# Altium PCB PCB1.pcbdoc
Units mil, origin at the board's own origin, x right, y up, seen from the top; angles counter-clockwise.
Board outline 5600 x 5600 mil, 2 copper layers (Top Layer, Bottom Layer); 67 components, 31 nets, 147 pads, 27 vias.
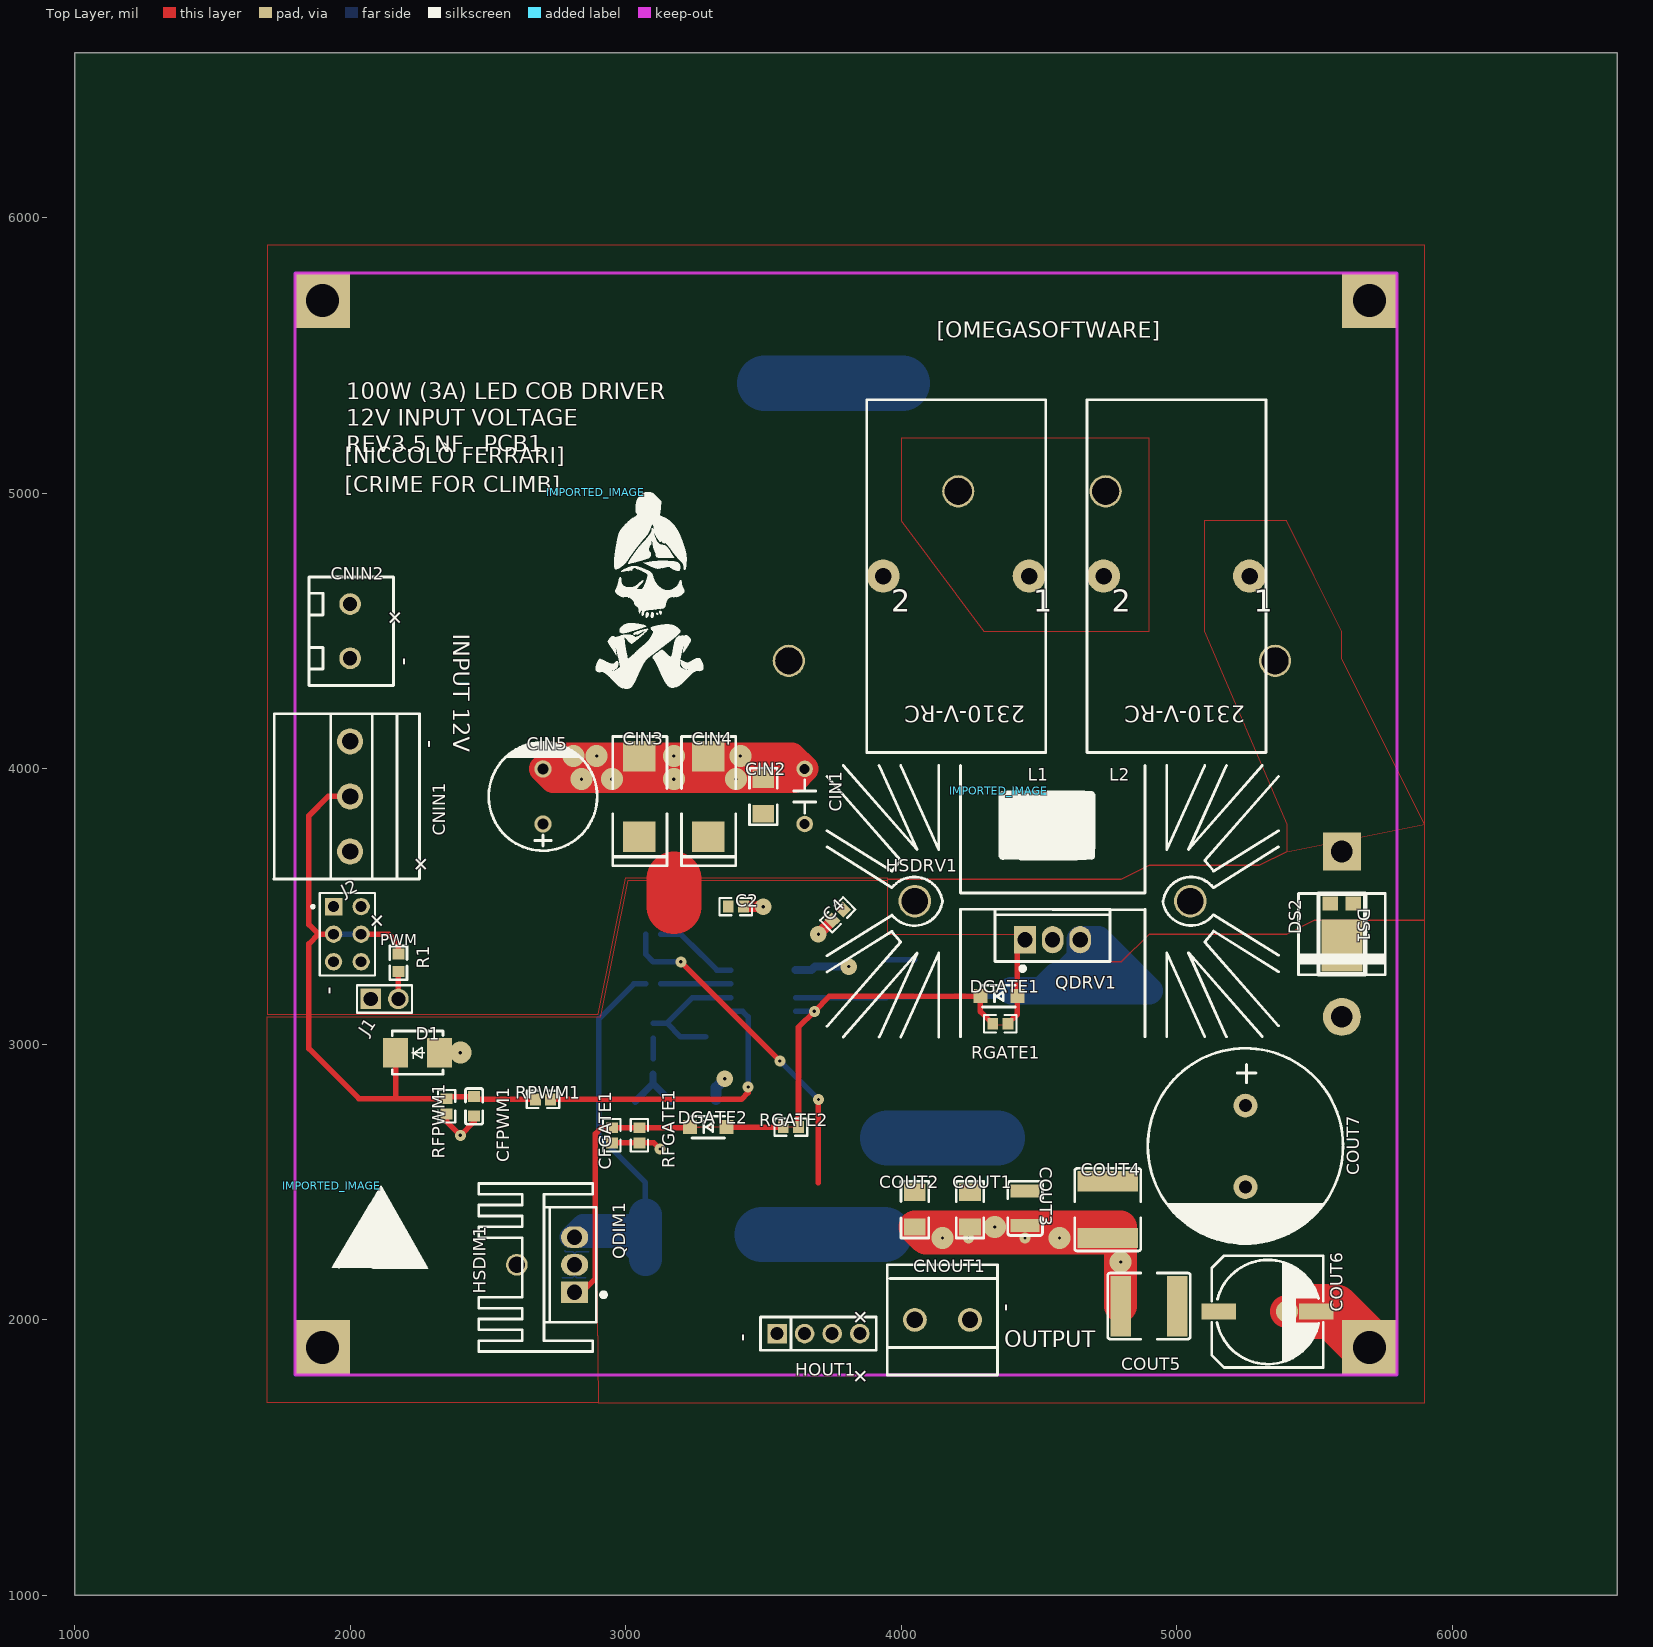
[diagram p0: Top Layer view]
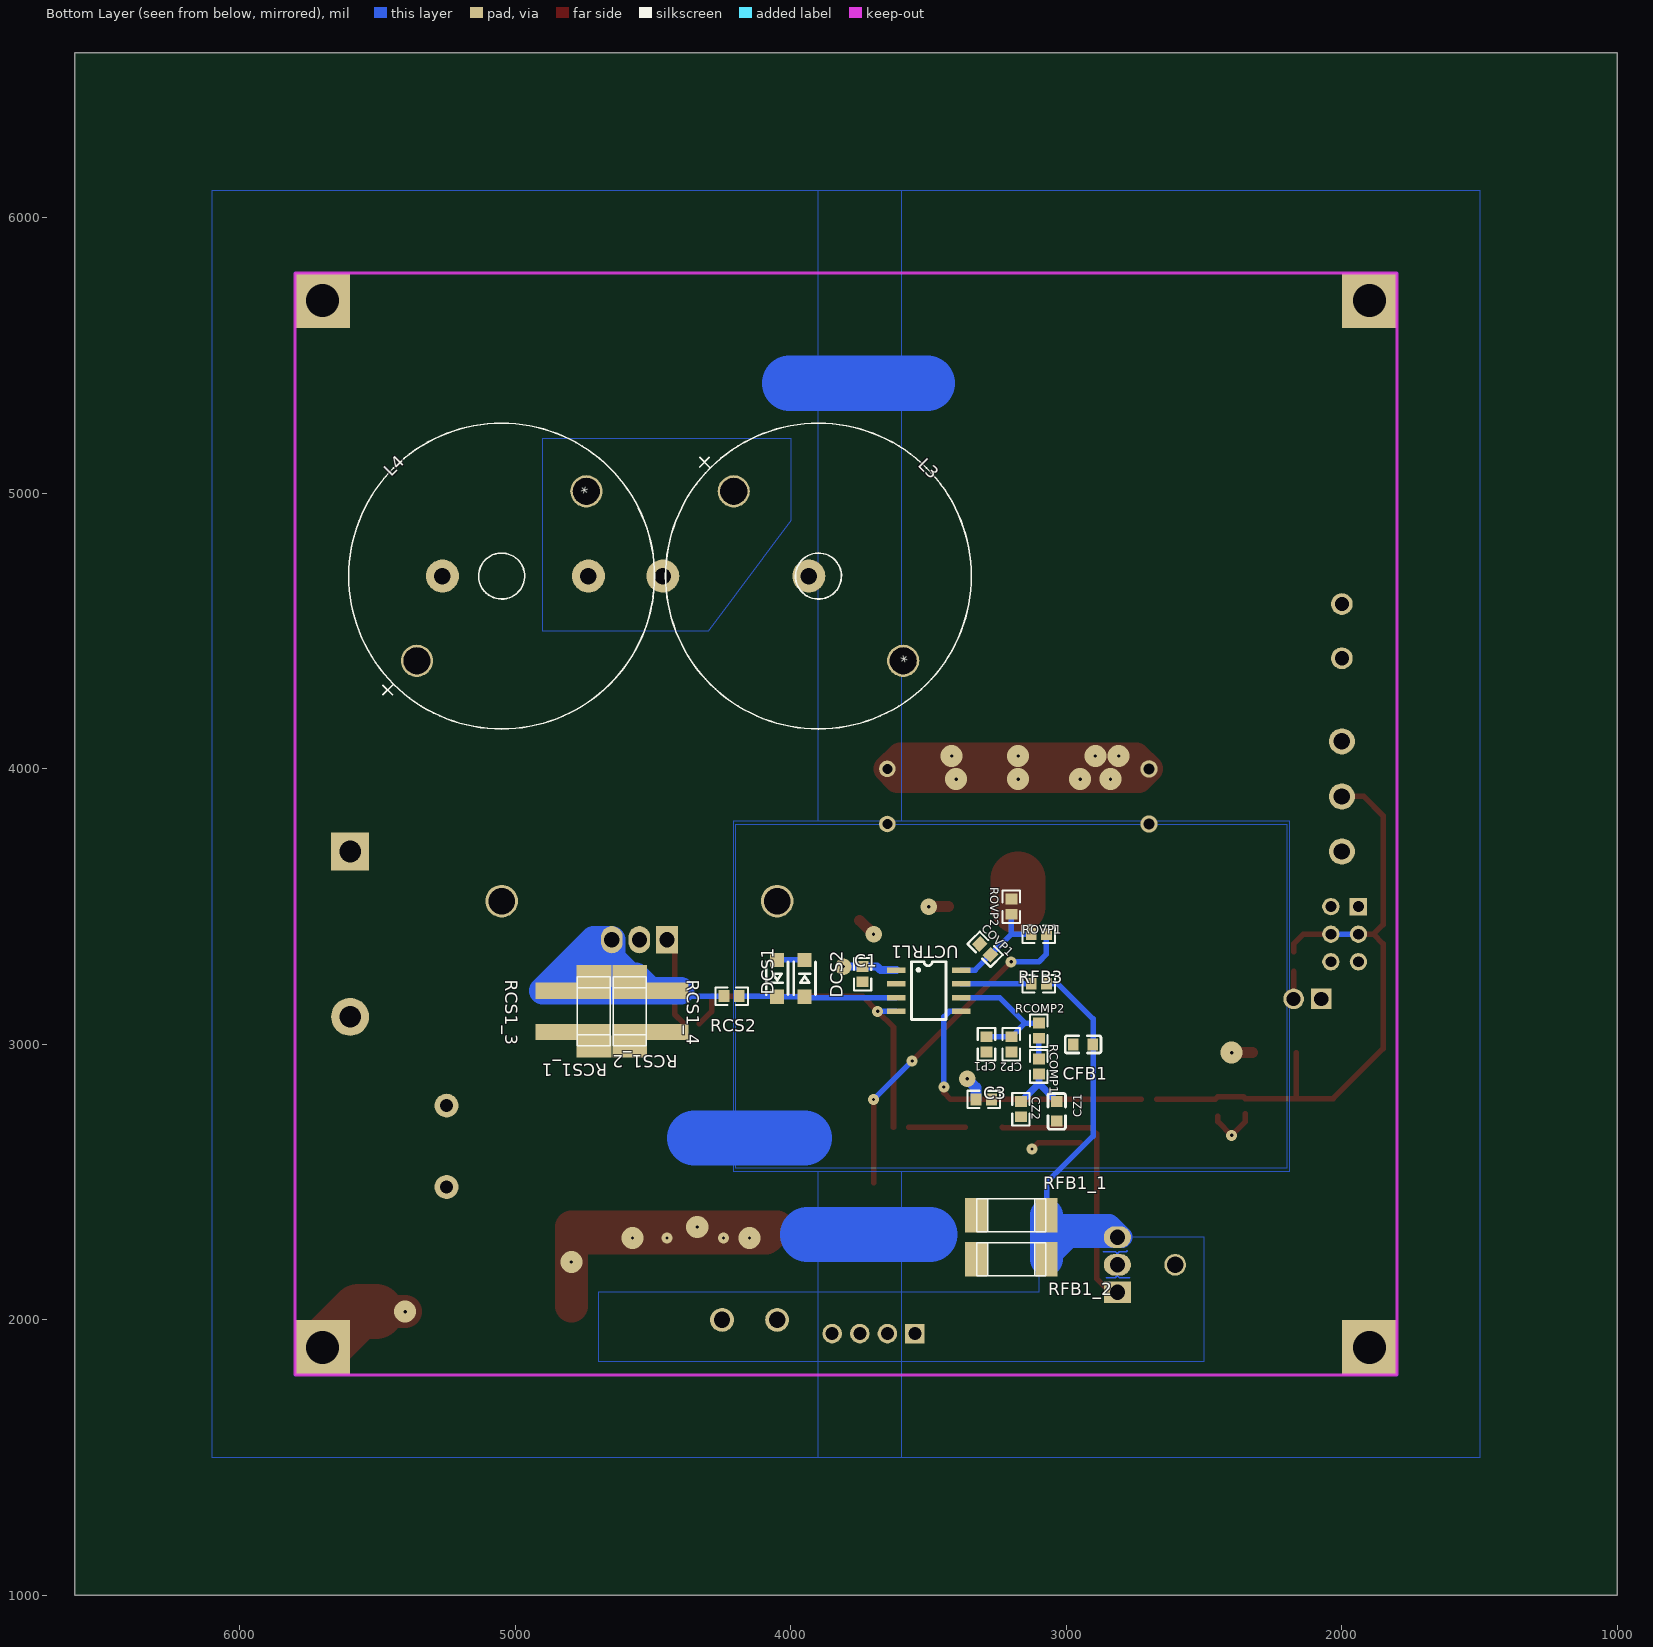
[diagram p1: Bottom Layer view, seen from below]

## Layer stack, top to bottom
Top Layer: signal copper (thickness not stored)
Dielectric: dielectric 12.6, FR-4, Dk 4.8
Bottom Layer: signal copper (thickness not stored)

## Board outline
6600,1000 1000,1000 1000,6600 6600,6600

## Components (designator, comment, footprint, x,y, rotation, side; value= is the part's Value field where it differs from the comment)
C1 "100nF" 0603#1 3740,3255 r90 bottom
C2 "100nF" 0603#2 3400,3500 r0 top
C3 "100nF" 0603#1 3300,2800 r0 bottom
C4 "100nF" 0603#2 3770,3470 r225 top
CFB1 "1nF" C0603#1 2939.57,3000 r0 bottom
CFGATE1 "6.8nF" 0603#2 2950,2670 r90 top
CFPWM1 "1nF" C0603#2 2450,2775 r90 top
CIN1 "2.2uF" CAP-0.2 3650,3900 r270 top
CIN2 "10uF" 1206 3500,3900 r270 top
CIN3 "47uF" CAP-SMD_L7.3-W4.3 3050,3900 r90 top
CIN4 "47uF" CAP-SMD_L7.3-W4.3 3300,3900 r90 top
CIN5 "470uF" CAP-TH_BD10.0-P5.00-D1.0-FD 2700,3900 r90 top
CNIN1 "SMKDSP1.5/3-5.08" SMKDSP1.5/3-5.08-W 2000,3900 r270 top
CNIN2 "WJ126V-5.0-2P" WJ126V-5.0-2P 2000,4500 r0 top
CNOUT1 "MKDSN1.5/2-5.08" MKDSN1.5/2-5.08 4150,2000 r0 top
COUT1 "1uF" 1206 4250,2400 r90 top
COUT2 "1uF" 1206 4050,2400 r90 top
COUT3 "4.7uF" C1210 4449.99,2405 r90 top
COUT4 "10uF" C2220 4750,2400 r90 top
COUT5 "10uF" C2220 4900,2050 r0 top
COUT6 "22uF" CAP-SMD_BD10.0-L10.3-W10.3-FD 5330,2030 r0 top
COUT7 "1000uF" CAP-TH_BD18.0-P7.50-D1.2-FD 5250,2630 r270 top
COVP1 "100pF" 0603#1 3295,3345 r45 bottom
CP1 "150nF" 0603#1 3290,3000 r90 bottom
CP2 "10nF" 0603#1 3200,3000 r90 bottom
CZ1 "1nF" C0603#1 3035.03,2757.1 r90 bottom
CZ2 "2.2nF" 0603#1 3165,2765 r90 bottom
D1 "1SMB5919BT3G" SMB_L4.6-W3.6-LS5.3-RD 2245,2970 r0 top
DCS1 "MMSD4148T3G" SOD-123FL_L2.6-W1.6-LS3.4-RD#1 3950,3240 r90 bottom
DCS2 "MMSD4148T3G" SOD-123FL_L2.6-W1.6-LS3.4-RD#1 4050,3240 r270 bottom
DGATE1 "MMSD4148T3G" SOD-123FL_L2.6-W1.6-LS3.4-RD#2 4355,3175 r0 top
DGATE2 "MMSD4148T3G" SOD-123FL_L2.6-W1.6-LS3.4-RD#2 3300,2700 r0 top
DS1 "SBX2540R" AXIAL-8.0X7.5 5600,3400 r270 top
DS2 "FSV2060L" TO-277B_3P-L6.1-W4.3-LS7.0-BR 5600,3435 r90 top
HOUT1 "Header-Male-2.54_1x4" DIP-1X4P-2.54MM-M 3700,1950 r0 top
HSDIM1 "15*10.5*21" 15*10.5*21 2605,2200 r90 top
HSDRV1 "HEATSINK HS142-50" HS142-50 4550,3520 r0 top
IMPORTED_IMAGE "IMPORTED_IMAGE" IMPORTED_IMAGE 4354.52,3920.64 r0 top
IMPORTED_IMAGE "IMPORTED_IMAGE" IMPORTED_IMAGE 1933.31,2487.12 r0 top
IMPORTED_IMAGE "IMPORTED_IMAGE" IMPORTED_IMAGE 2891.18,5004.52 r0 top
J1 "Header-Male-2.54_1x2" HDR-2X1/2.54 2125,3165 r90 top
J2 "Header-Male-2.54_2x3" HDR-TH_6PIN-V-ROW2-COL3-MALE-PITCH2.54 1990,3400 r0 top
L1 "2310-V-RC" 2310-V-RC 4200,4700 r180 top
L2 "2310-V-RC" 2310-V-RC 5000,4700 r180 top
L3 "AIRD-03-101K" AIRD-03-101K 3900,4700 r45 bottom
L4 "AIRD-03-101K" AIRD-03-101K 5050,4700 r315 bottom
QDIM1 "LPN1510C" TO-220-3_L10.0-W4.5-P2.54-L 2815,2200 r90 top
QDRV1 "LPN1510C" TO-220-3_L10.0-W4.5-P2.54-L 4550,3380 r0 top
R1 "30K" R0603 2175.03,3296.1 r270 top
RCOMP1 "470" 0603#1 3100,2920 r90 bottom
RCOMP2 "10" 0603#1 3100,3050 r90 bottom
RCS1_1 "0.06" 2512 4715,3120 r270 bottom
RCS1_2 "0.06" 2512 4585,3120 r270 bottom
RCS1_3 "0.1" 1225 4790,3120 r270 bottom
RCS1_4 "0.1" 1225 4510,3120 r270 bottom
RCS2 "100" 0603#1 4215,3175 r0 bottom
RFB1_1 "0.02" 2512 3200.1,2380 r0 bottom
RFB1_2 "0.02" 2512 3200.1,2220 r0 bottom
RFB3 "1K" 0603#1 3100,3220 r0 bottom
RFGATE1 "3.6K" 0603#2 3050,2670 r90 top
RFPWM1 "20K" 0603#2 2350,2775 r90 top
RGATE1 "10" 0603#2 4360,3075 r180 top
RGATE2 "100" 0603#2 3600,2700 r180 top
ROVP1 "220K" 0603#1 3100,3400 r0 bottom
ROVP2 "13K" 0603#1 3200,3500 r270 bottom
RPWM1 "1K" 0603#2 2700,2800 r0 top
UCTRL1 "MP4008" SOIC-8 3500,3200 r90 bottom

## Footprints (in the part's own frame and the unit in brackets; to place one, negate y for a bottom-side part, rotate by r counter-clockwise, add the part's x,y. Pads: shape width x height; smd on the part's side, far side on the other; paste and mask are expansions set on the pad)
15*10.5*21 [mm]
  round 2 hole 1.5: 1(0,0)
  silkscreen extent -8,-7 7.5,3.5
0603#1 [mm]
  rect 1x1.1 smd: 1(0.7,0) 2(-0.7,0)
  silkscreen extent -1.5,-0.8 1.5,0.8
0603#2 [mm]
  rect 1x1.1 smd: 1(-0.7,0) 2(0.7,0)
  silkscreen extent -1.5,-0.8 1.5,0.8
1206 [mil]
  rect 63x78.74 smd: 1(-62.99,0) 2(62.99,0)
  silkscreen extent -103,-50 103,50
1225 [mm]
  rect 1.5x7 smd: 1(1.9,0) 2(-1.9,0)
2310-V-RC [mil]
  round 120 hole 60: 1(-265,0) 2(265,0)
  silkscreen extent -325,-640 325,640
2512 [mil]
  rect 78.7x126 smd: 1(128,0) 2(-128,0)
  silkscreen extent -125,-60 125,60
AIRD-03-101K [mil]
  round 117 hole 97 slot 97.2 at 0 deg: 1(435,-0.09) 2(-435,-0.09)
  silkscreen extent -555,-555 610,555
AXIAL-8.0X7.5 [mm]
  rect 3.5x3.5 hole 2: 1(-7.62,0)
  round 3.5 hole 2: 2(7.62,0)
  silkscreen extent -3.75,-4 3.75,4
C0603#1 [mm]
  rect 1x1.1 smd: 1(0.9,0) 2(-0.9,0)
  silkscreen extent -1.65,-0.8 1.65,0.8
C0603#2 [mm]
  rect 1x1.1 smd: 1(-0.9,0) 2(0.9,0)
  silkscreen extent -1.65,-0.8 1.65,0.8
C1210 [mm]
  rect 1.2x2.7 smd: 1(-1.6,0) 2(1.6,0)
  silkscreen extent -2.5,-1.6 2.5,1.6
C2220 [mil]
  rect 74x220 smd: 1(-103,0) 2(103,0)
  silkscreen extent -150,-120 150,120
CAP-0.2 [mil]
  round 60 hole 36: 1(-100,0) 2(100,0)
  silkscreen extent -60,-40 60,40
CAP-SMD_BD10.0-L10.3-W10.3-FD [mm]
  rect 3.2x1.5 smd: 1(-4.5,0) 2(4.5,0)
  silkscreen extent -5.15,-5.15 5.15,5.15
CAP-SMD_L7.3-W4.3 [mil]
  rect 110.24x118.5 smd: 1(-146.5,0) 2(146.5,0)
  silkscreen extent -252,-100 218,97
CAP-TH_BD10.0-P5.00-D1.0-FD [mm]
  round 1.6 hole 1: 1(-2.54,0) 2(2.54,0)
  silkscreen extent -5,-5 5.08,4.99
CAP-TH_BD18.0-P7.50-D1.2-FD [mm]
  round 2.2 hole 1.2: 1(-3.75,0) 2(3.75,0)
  silkscreen extent -9.03,-9 9,9
DIP-1X4P-2.54MM-M [mm]
  rect 1.8x1.8 hole 1.2: 1(-3.81,0)
  round 1.8 hole 1.2: 2(-1.27,0) 3(1.27,0) 4(3.81,0)
  silkscreen extent -5.33,-1.52 5.33,1.52
HDR-2X1/2.54 [mm]
  rect 1.9x1.9 hole 1.3: 1(0,1.27)
  round 1.9 hole 1.3: 2(0,-1.27)
  silkscreen extent -1.27,-2.54 1.27,2.54
HDR-TH_6PIN-V-ROW2-COL3-MALE-PITCH2.54 [mm]
  rect 1.6x1.6 hole 1: 1(-1.27,2.54)
  round 1.6 hole 1: 2(1.27,2.54) 3(-1.27,0) 4(1.27,0) 5(-1.27,-2.54) 6(1.27,-2.54)
  silkscreen extent -3.3,-3.81 2.54,3.81
HS142-50 [mm]
  round 3 hole 2.45: 1(-12.7,0) 1(12.7,0)
  silkscreen extent -20.8,-12.54 20.83,12.5
IMPORTED_IMAGE [mil]
  silkscreen extent 0,-252 349,0
MKDSN1.5/2-5.08 [mm]
  round 2.2 hole 1.5: 1(-2.54,0) 2(2.54,0)
  silkscreen extent -5.08,-5.08 5.08,5.08
R0603 [mm]
  rect 1x1.1 smd: 1(-0.8,0) 2(0.8,0)
  silkscreen extent -1.55,-0.8 1.55,0.81
SMB_L4.6-W3.6-LS5.3-RD [mm]
  rect 2.29x2.72 smd: 1(-2.025,0) 2(2.025,0)
  silkscreen extent -2.35,-2 2.35,2
SMKDSP1.5/3-5.08-W [mil]
  round 94.49 hole 59.06: 1(-200,0) 2(0,0) 3(200,0)
  silkscreen extent -300,-278 300,252
SOD-123FL_L2.6-W1.6-LS3.4-RD#1 [mm]
  rect 1.3x1.3 smd: 1(1.7,0) 2(-1.7,0)
  silkscreen extent -1.5,-1 1.5,1
SOD-123FL_L2.6-W1.6-LS3.4-RD#2 [mm]
  rect 1.3x1.3 smd: 1(-1.7,0) 2(1.7,0)
  silkscreen extent -1.5,-1 1.5,1
SOIC-8 [mil]
  rect 20x67 smd: 1(70,117) 2(20,117) 3(-30,117) 4(-80,117) 5(-80,-118) 6(-30,-118) 7(20,-118) 8(70,-118)
  silkscreen extent -110,-63 100,62
TO-220-3_L10.0-W4.5-P2.54-L [mm]
  rect 2.002x2.499 hole 1.4: 1(-2.54,0)
  oval 2x2.5 hole 1.4: 2(0,0) 3(2.54,0)
  silkscreen extent -5.3,-2.86 5.3,2.8
TO-277B_3P-L6.1-W4.3-LS7.0-BR [mil]
  rect 50.8x56 smd: 1(76.1,-41.6) 2(76.1,41.6)
  rect 188.98x149.61 smd: 3(-76.1,0)
  silkscreen extent -180,-85 112,85
WJ126V-5.0-2P [mm]
  round 2 hole 1.3: 1(0,2.501) 2(0,-2.501)
  silkscreen extent -3.8,-5 4,5

## Free pads (board coordinates)
  rect 200x200 hole 120: 1(1900,1900) 1(1900,5700) 1(5700,1900) 1(5700,5700)

## Via types
v1: diameter 80, hole 12, Top Layer to Bottom Layer, 14 vias
v2: diameter 40, hole 12, Top Layer to Bottom Layer, 9 vias
v3: diameter 60, hole 12, Top Layer to Bottom Layer, 4 vias

## Nets (pads, with @x,y where several pads share a name; then routed paths per layer and width w, separated by ;. In a path a pad name is that pad's centre, name@x,y a point inside that pad or via, vN(x,y) a via of type N, cw(c..) or ccw(c..) an arc to the next point about the centre after c; other vN are vias at no path point)
COMP: CP1.1 CP2.1 RCOMP2.1 UCTRL1.6 | length 481
  Bottom Layer w20: RCOMP2.1 3150,3077.56 ; CP1.1 CP2.1 3150,3077.56 ; UCTRL1.6 3242.44,3170 3150,3077.56
CS: DCS1.2 DCS2.1 RCS2.2 UCTRL1.3 | length 572.5
  Bottom Layer w20: UCTRL1.3 3946.93,3170 DCS1.2 DCS2.1 4051.93,3175 RCS2.2
DGATE2_2: DGATE2.2 RGATE2.2 | length 205.5
  Top Layer w20: DGATE2.2 RGATE2.2
DIMGATE: CFGATE1.2 DGATE2.1 QDIM1.1 RFGATE1.2 | length 974.1
  Top Layer w20: QDIM1.1 2840,2100 2890,2150 2890,2675 2912.5,2697.5 CFGATE1.2@2950,2697.5 ; CFGATE1.2 RFGATE1.2 3230.62,2697.55 DGATE2.1
FB: RFB3.1 UCTRL1.7 | length 254.4
  Bottom Layer w20: RFB3.1 UCTRL1.7
GATE: DGATE1.1 RGATE1.2 RGATE2.1 UCTRL1.4 | length 1256
  Top Layer w20: RGATE2.1 3627.56,3062.56 v2(3685,3120) 3740,3175 DGATE1.1 4288.07,3119.37 RGATE1.2
  Bottom Layer w20: UCTRL1.4 v2(3685,3120)
GND: C1.2 C2.2 C3.2 C4.2 CFB1.1 CFGATE1.1 CFPWM1.1 CIN1.1 CIN2.1 CIN3.2 CIN4.2 CIN5.2 CNIN1.1 CNIN2.2 COUT1.1 COUT2.1 COUT3.1 COUT4.1 COUT5.1 COUT6.2 COUT7.2 COVP1.1 CP1.2 CP2.2 CZ1.2 CZ2.2 D1.2 DCS1.1 DCS2.2 J2.5 J2.6 pad.1 RCS1_1.1 RCS1_2.1 RCS1_3.1 RCS1_4.1 RFB1_1.1 RFB1_2.1 RFGATE1.1 RFPWM1.1 ROVP2.2 UCTRL1.2 | length 6764.7
  Top Layer w20: RFPWM1.1 2350,2720 v2(2400,2670) 2450,2720 CFPWM1.1 ; CFGATE1.1 RFGATE1.1 3102.56,2642.44 v2(3125,2620)
  Top Layer w40: D1.2 v1(2400,2970) ; C2.2 v3(3500,3500) ; v3(3700,3400) C4.2
  Top Layer w100: v1(3416.49,4046.5) CIN2.1 ; v1(3416.49,4046.5) CIN4.2 v1(3175,4046.5) CIN3.2 v1(2895,4046.5) v1(2810,4046.5) 2746.5,4046.5 CIN5.2 2737.01,3962.99 v1(2840,3962.99) v1(2950,3962.99) v1(3175,3962.99) v1(3400,3962.99) CIN2.1 ; v1(3416.49,4046.5) 3603.5,4046.5 CIN1.1 3612.99,3962.99 CIN2.1
  Top Layer w120: COUT3.1@4450,2332 4444.99,2337.01 4295,2337.01 COUT1.1 ; v1(5400,2030) COUT6.2 ; COUT1.1 COUT2.1 4090.01,2297 v1(4150,2297) v2(4245,2297) v2(4450,2297) v1(4575,2297) COUT4.1 ; COUT1.1 v1(4340,2337.01) 4750,2337 ; COUT4.1 4797,2297 v1(4797,2210) COUT5.1 4797,2337 4750,2337 ; COUT4.1 4750,2337
  Top Layer w200: COUT6.2 5570,2030 pad.1@5700,1900
  Bottom Layer w20: DCS1.1 DCS2.2
  Bottom Layer w200: 3495,2310 3940,2310 ; 3505,5400 4005,5400 ; 3950,2660 4350,2660
J1_2: J1.2 R1.2 | length 99.6
  Top Layer w20: J1.2 R1.2
null: 
OVP: COVP1.2 ROVP1.1 ROVP2.1 UCTRL1.8 | length 380.7
  Bottom Layer w20: ROVP1.1 3200,3400 ; ROVP2.1 3200,3400 ; UCTRL1.8 3331.02,3270 COVP1.2 3274.49,3325.51 3200,3400
PWM: CFPWM1.2 CNIN1.2 D1.1 J2.3 J2.4 R1.1 RFPWM1.2 RPWM1.1 | length 2459.8
  Top Layer w20: J2.3 1885,3400 ; CNIN1.2 1920,3900 1850,3830 1850,3435 1885,3400 ; J2.4 2140,3400 2175,3365 R1.1@2175,3335.44 ; D1.1 2165.28,2803.28 2165,2803 ; RPWM1.1 2460.43,2800 CFPWM1.2 2357.89,2810.43 RFPWM1.2 2165.45,2802.55 2165,2803 ; 1885,3400 1850,3365 1850,2985 2032,2803 2165,2803
  Bottom Layer w20: J2.3 J2.4
PWM_IN: RPWM1.2 UCTRL1.5 | length 1074
  Top Layer w20: RPWM1.2 3420,2800 3445,2825 v2(3445,2845)
  Bottom Layer w20: UCTRL1.5 3425,3120 3445,3100 v2(3445,2845)
RCOMP1_2: CZ1.1 CZ2.1 RCOMP1.2 | length 253.6
  Bottom Layer w25: CZ1.1@3035,2792.56 3100,2857.56 ; CZ2.1 3100,2857.56 ; 3100,2857.56 RCOMP1.2 3100,2857.56
RCOMP2_2: RCOMP1.1 RCOMP2.2 | length 74.9
  Bottom Layer w20: RCOMP1.1 RCOMP2.2
RCS: QDRV1.3 RCS1_1.2 RCS1_2.2 RCS1_3.2 RCS1_4.2 RCS2.1 | length 2027.3
  Bottom Layer w20: RCS2.1 RCS1_4.2@4520,3175 ; 4370,3175 4389.8,3194.8 RCS1_4.2 RCS1_4.2@4507.4,3194.8 ; RCS1_2.2 RCS1_1.2
  Bottom Layer w100: RCS1_4.2@4400,3194.81 RCS1_4.2 ; RCS1_4.2 4563.19,3248 RCS1_2.2 ; RCS1_4.2 RCS1_3.2 ; RCS1_2.2 RCS1_1.2 ; RCS1_2.2 4650,3313 ; 4650,3313 RCS1_1.2 ; 4650,3313 QDRV1.3 ; 4650,3313 QDRV1.3 ; QDRV1.3 4715,3380 4900.2,3194.8 RCS1_3.2 ; RCS1_1.2 4736.81,3248 RCS1_3.2
RFB: CFB1.2 QDIM1.3 RFB1_1.2 RFB1_2.2 RFB3.2 | length 1775.7
  Bottom Layer w20: RFB1_1.2@3072.05,2380 3072.05,2497.95 2902.56,2667.44 2902.56,3000 2902.56,3092.56 3030,3220 RFB3.2
  Bottom Layer w80: RFB1_1.2@3072,2380 3037,2345 2845,2345 2800,2300 2992.04,2300 RFB1_2.2@3072.04,2220
  Bottom Layer w120: RFB1_2.2 RFB1_1.2
S$6: 
S$8: 
S$12: 
S$14: 
S$15: 
S$17: 
S$26: 
S$67: 
S$69: 
SG: DGATE1.2 QDRV1.1 RGATE1.1 | length 330.9
  Top Layer w20: RGATE1.1 4421.93,3109.37 DGATE1.2 4421.93,3351.93 QDRV1.1
VCC: C1.1 C2.1 C3.1 C4.1 CIN1.2 CIN2.2 CIN3.1 CIN4.1 CIN5.1 CNIN1.3 CNIN2.1 J1.1 J2.1 J2.2 L1.2 L3.2 UCTRL1.1 | length 386.7
  Top Layer w200: 3175,3500 3175,3600
  Bottom Layer w30: UCTRL1.1 3675,3270 3687.6,3282.6 C1.1 v3(3810,3282.6)
  Bottom Layer w40: C3.1 3327.56,2842.56 v3(3360,2875)
VL1_2: L1.1 L2.2 L3.1 L4.2
VL+: DS1.1 DS2.1 DS2.2 HSDRV1.1 L2.1 L4.1 QDRV1.2
VOUT+: CNOUT1.1 COUT1.2 COUT2.2 COUT3.2 COUT4.2 COUT5.2 COUT6.1 COUT7.1 DS1.2 DS2.3 HOUT1.3 HOUT1.4 ROVP1.2 | length 1221.5
  Top Layer w20: v2(3200.3,3299.7) v2(3560,2940) ; 3700,2497.05 v2(3700,2800)
  Bottom Layer w20: ROVP1.2 3072.45,3327.55 3100,3300 3200,3300 v2(3200.3,3299.7) ; v2(3560,2940) v2(3700,2800)
VOUT-: CNOUT1.2 HOUT1.1 HOUT1.2 HSDIM1.1 QDIM1.2 | length 343.3
  Bottom Layer w6: 2770,2152.47 2807.47,2152.47 2815,2160 ; 2780,2250 2783.07,2246.93 2808.07,2246.93 2815,2240 ; 2855,2152.47 2822.53,2152.47 2815,2160 ; 2865,2246.93 2821.93,2246.93 2815,2240 ; 2815,2160 QDIM1.2 ; 2815,2160 QDIM1.2 ; QDIM1.2 2815,2240 ; QDIM1.2 2815,2240

## Polygon pours and split planes (outlines as drawn)
GND on Bottom Layer (solid): 2200,3800 2200,2550 4200,2550 4200,3800
VOUT- on Bottom Layer (solid): 2500,1850 2500,2300 3100,2300 3100,2100 4700,2100 4700,1850
GND on Bottom Layer (solid): 1500,6100 1500,1500 3900,1500 3900,2540 2190,2540 2190,3810 3900,3810 3900,6100
GND on Bottom Layer (solid): 3600,6100 3600,3810 4210,3810 4210,2540 3600,2540 3600,1500 6100,1500 6100,6100
VL1_2 on Bottom Layer (solid): 4000,5200 4000,4900 4300,4500 4900,4500 4900,5200
VL1_2 on Top Layer (solid): 4000,5200 4000,4900 4300,4500 4900,4500 4900,5200
VL+ on Top Layer (solid): 5100,4900 5100,4500 5400,3800 5400,3700 5300,3650 4900,3650 4800,3600 3950,3600 3950,3400 4420,3400 4420,3300 4800,3300 4900,3400 5400,3400 5500,3450 5900,3450 5900,3800 5600,4400 5600,4500 5500,4700 5400,4900
VCC on Top Layer (solid): 1700,3100 2910,3100 3010,3595 3950,3595 3950,3400 4420,3400 4420,3100 4390,3070 4340,3070 4290,3110 4290,3175 3750,3175 3690,3120 3630,3060 3630,2700 2910,2700 2890,2670 2900,1700 1700,1700
VOUT+ on Top Layer (solid): 2900,1700 3400,1700 4700,1700 5900,1700 5900,3450 5500,3450 5400,3400 4900,3400 4800,3300 4420,3300 4420,3105 4390,3070 4330,3070 4285,3115 4285,3175 3740,3175 3625,3060 3630,2700 2910,2695 2890,2675
VCC on Top Layer (solid): 1700,5900 1700,4800 1700,3110 2900,3110 3000,3605 3950,3605 3950,3600 4800,3600 4900,3650 5300,3650 5400,3700 5900,3800 5900,5900

## Silkscreen, mask and mechanical layers (free items; w line width, h text height)
Top Overlay:
  text "[OMEGASOFTWARE]" at 4130,5545 h100
  text "100W (3A) LED COB DRIVER" at 1985.2,5341.1 h60
  text "12V INPUT VOLTAGE" at 1985,5245 h60
  text "PCB1" at 2485.2,5151.1 h60
  text "REV3.5 NF" at 1985,5150 h60
  text "[NICCOLÒ FERRARI]" at 1980,5090 h100
  text "[CRIME FOR CLIMB]" at 1980,4985 h100
  text "+" at 2168.79,4591.21 h60 r225
  text "INPUT 12V" at 2375,4490 h60 r270
  text "-" at 2220,4375 h60 r90
  text "-" at 2310,4075 h60 r90
  text "+" at 2263.79,3696.21 h60 r225
  text "+" at 2103.79,3491.21 h60 r225
  text "PWM" at 2110,3360 h40
  text "-" at 1950,3180 h60 r90
  text "+" at 3858.79,2051.21 h60 r225
  text "-" at 4405,2030 h60 r90
  text "-" at 3450,1920 h60 r90
  text "OUTPUT" at 4375,1900 h60
  text "+" at 3858.79,1836.21 h60 r225

## Text inside footprints (layer, text, board x,y; h text height)
L1: Top Overlay "1" at 4480,4570 h80; Top Overlay "2" at 3965,4570 h80
L2: Top Overlay "1" at 5280,4570 h80; Top Overlay "2" at 4765,4570 h80
L3: Document "Copyright 2016 Accelerated Designs. All rights reserved." at 3669.77,4473.44 h5 r225; Document "*" at 3589.56,4417.53 h39.37 r225; Bottom Overlay "*" at 3617.4,4389.69 h39.37 r45
L4: Document "Copyright 2016 Accelerated Designs. All rights reserved." at 4823.44,4930.23 h5 r135; Document "*" at 4767.53,5010.44 h39.37 r135; Bottom Overlay "*" at 4739.69,4982.6 h39.37 r315